# Allegro board flyer.brd
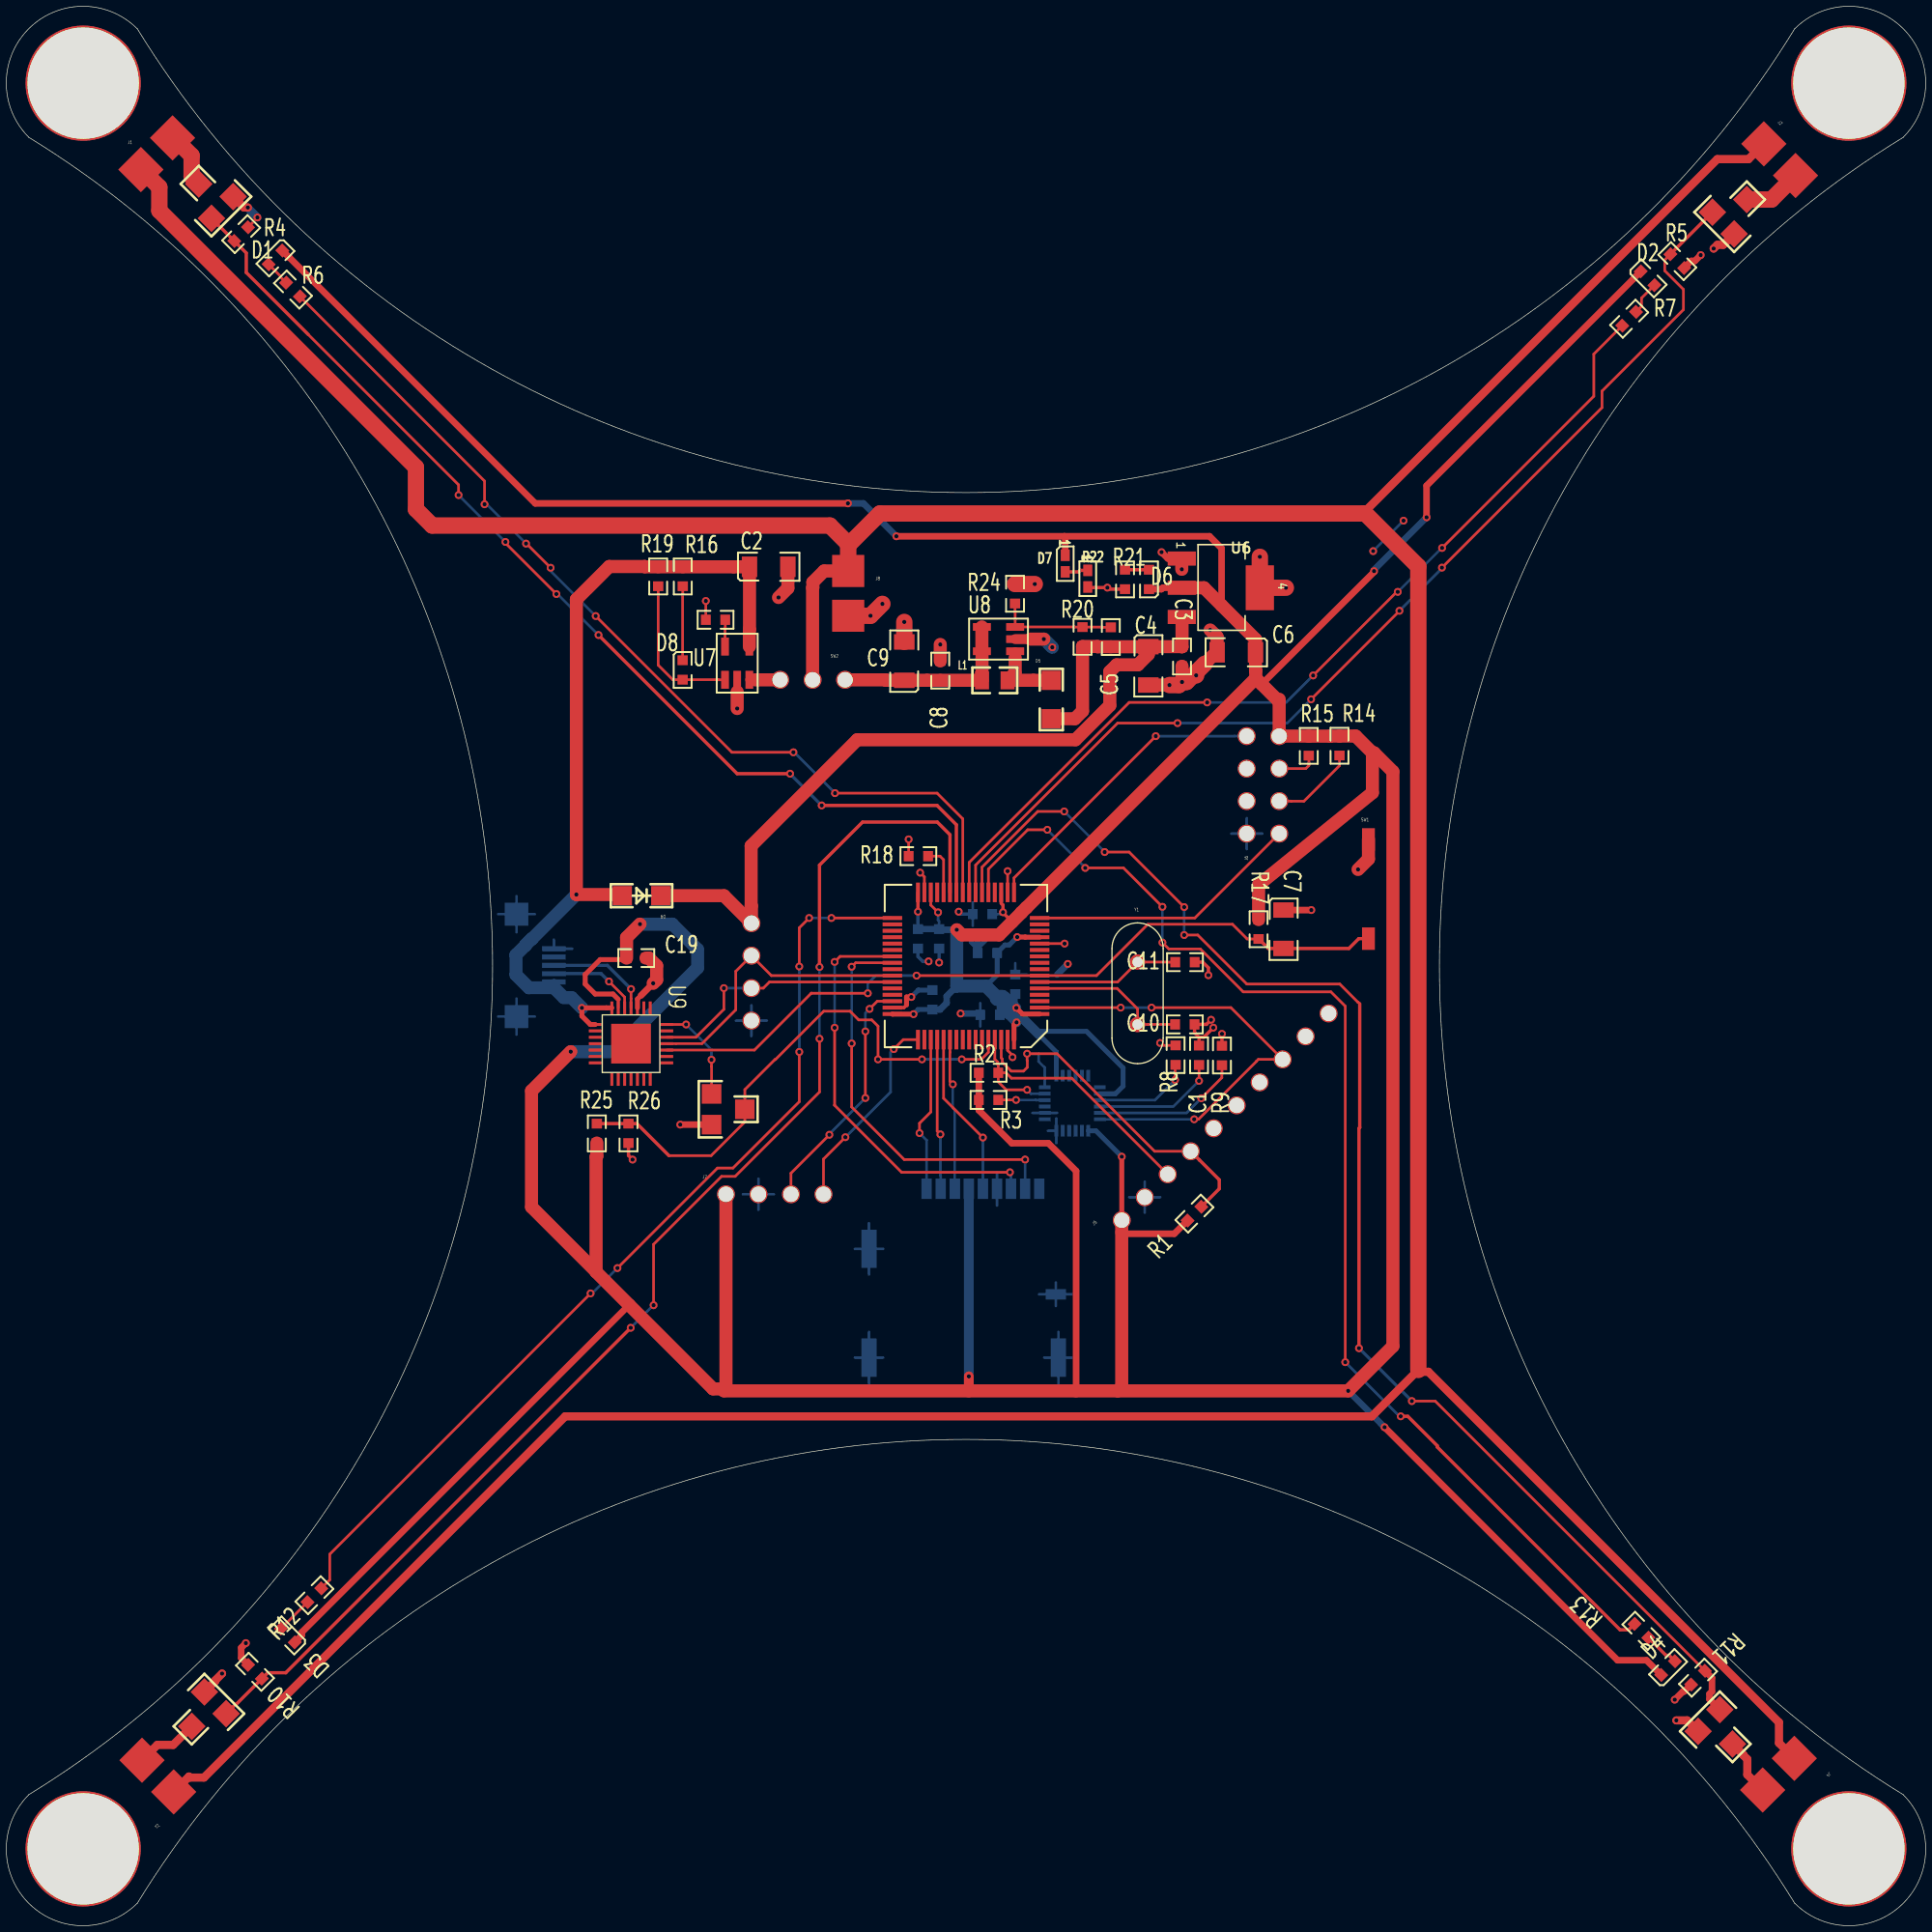
[diagram p0: board, top side]
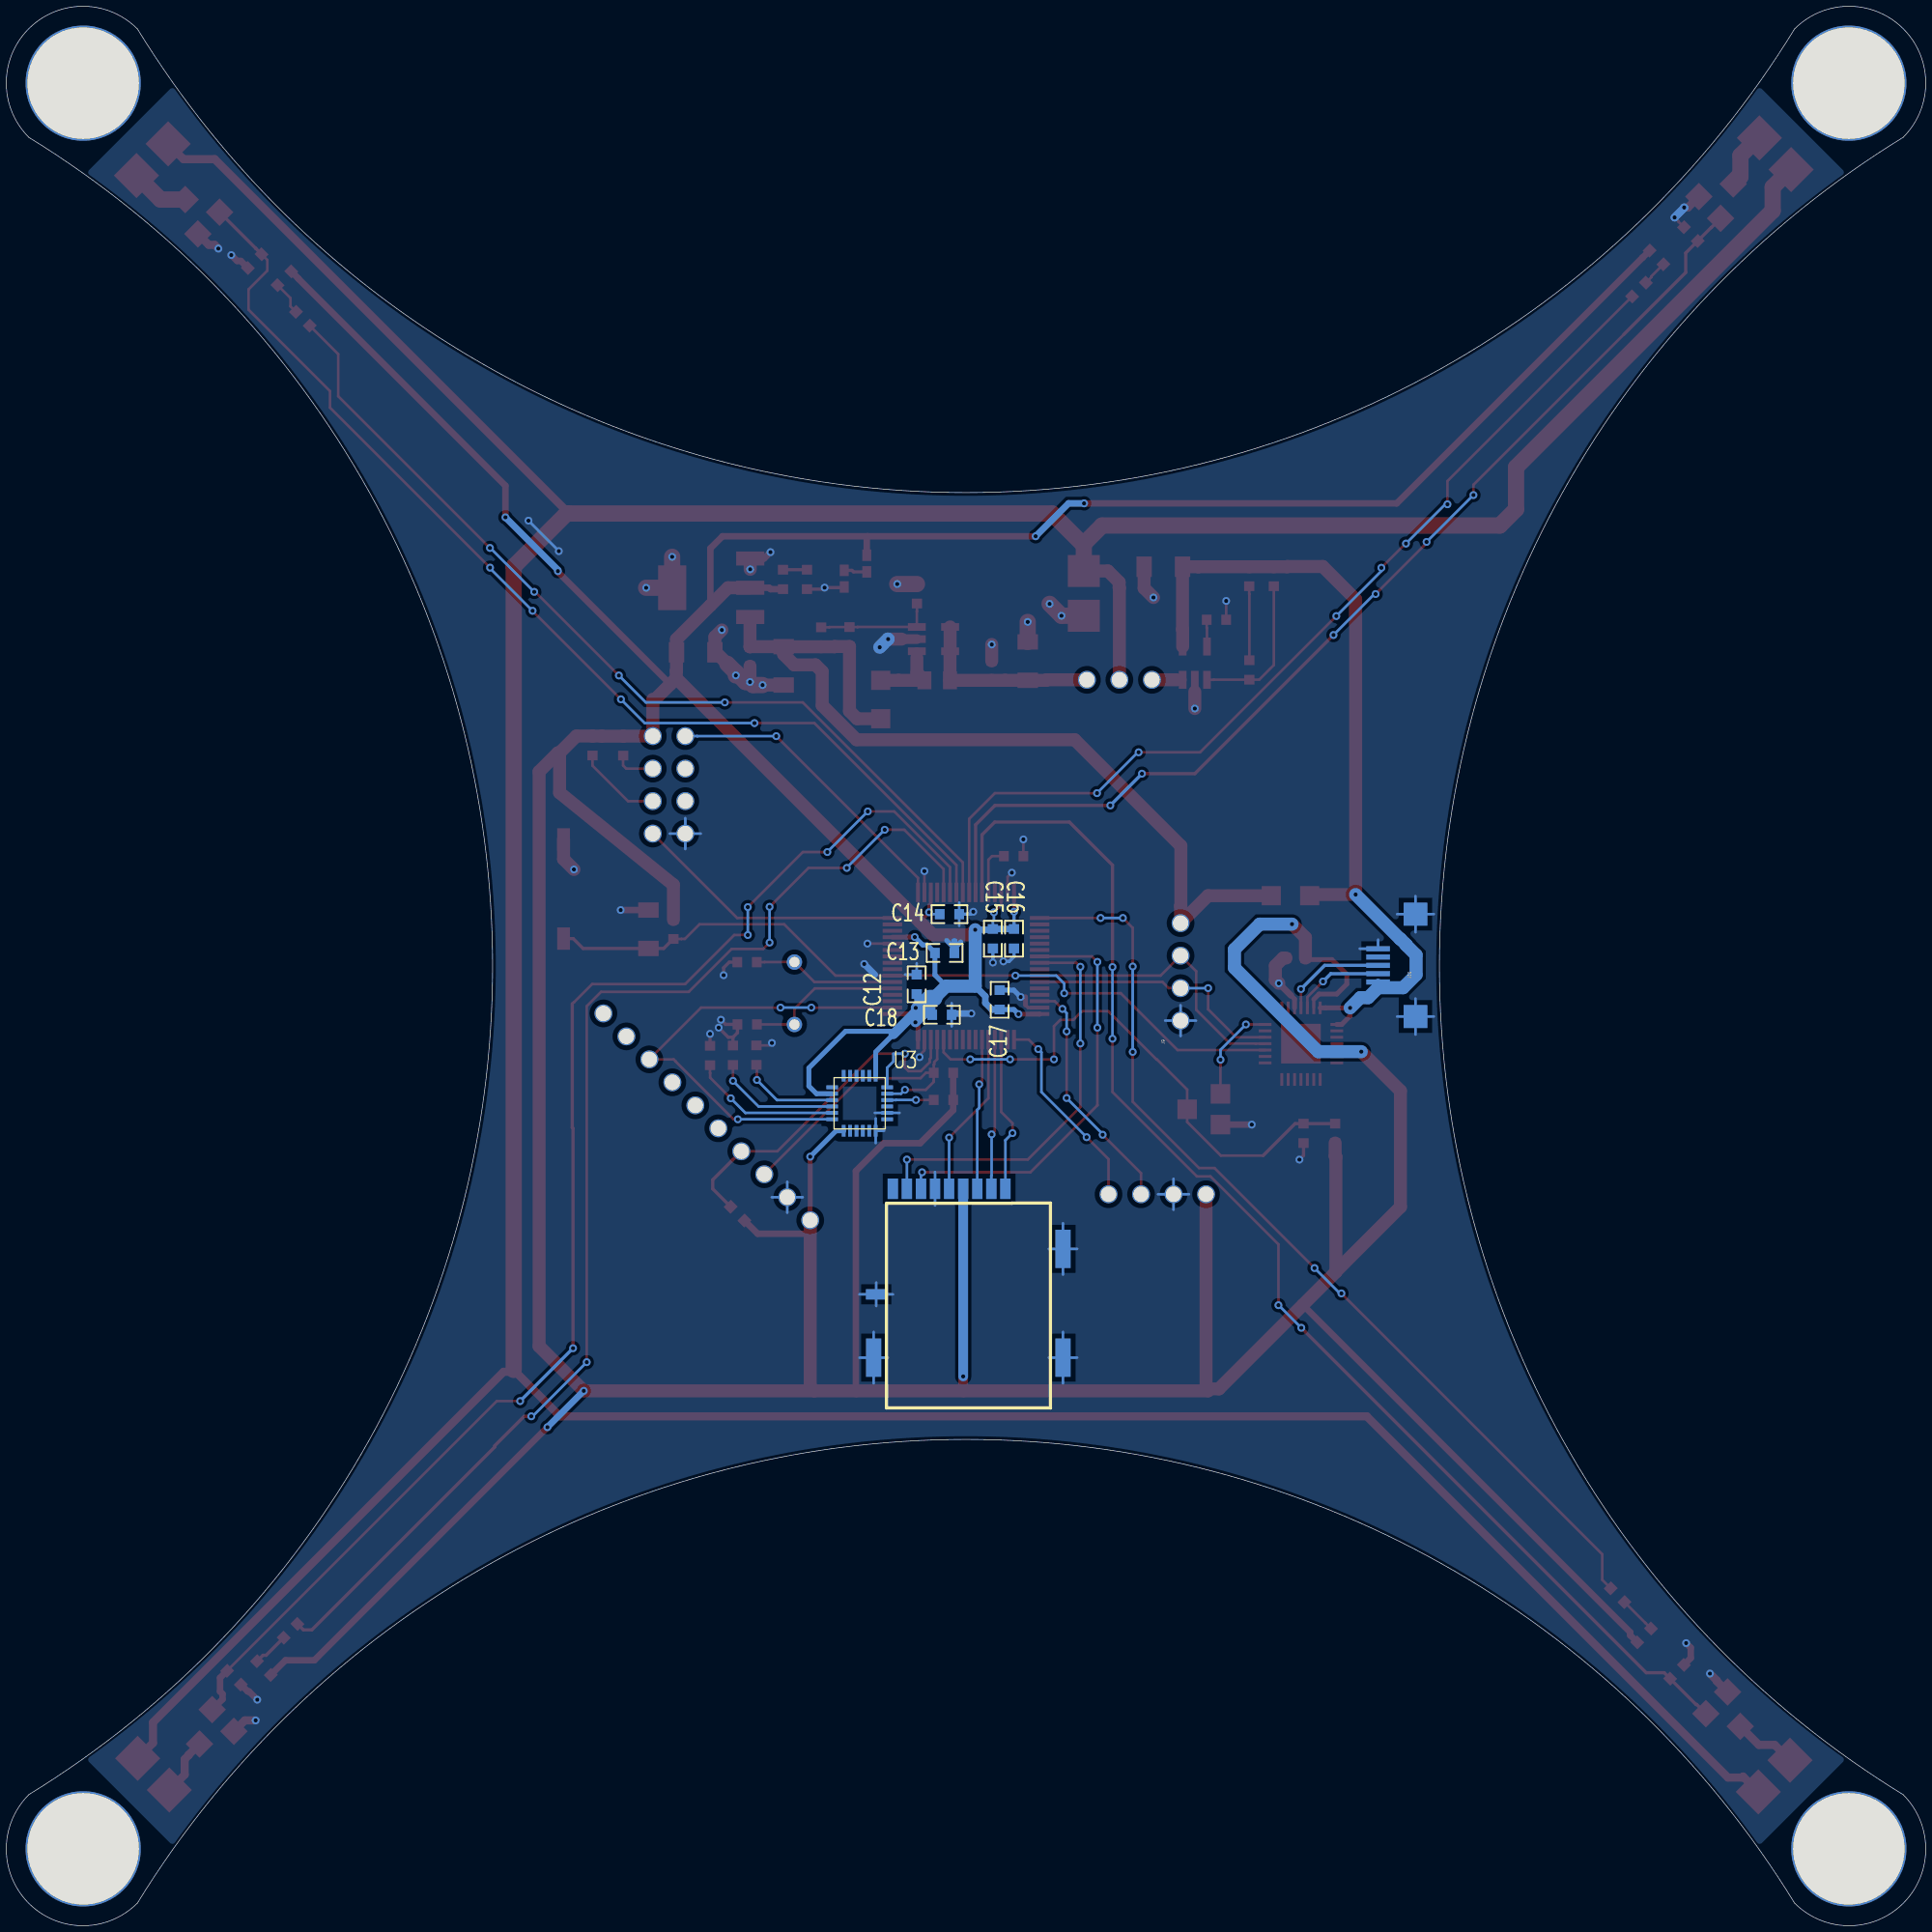
[diagram p1: board, bottom side, seen from below]

Outline 150 x 150 mm; copper layers: TOP, BOTTOM. Coordinates in mm from the lower left corner of the outline.

## Placement (name value [footprint] x y rotation side)
C1  100n  [NP0603]  93.22 68.03 90 top
C2  10u  [P1206]  59.58 106.21 0 top
C3  100n  [NP0603]  91.89 99.19 270 top
C4  10u  [P1206]  89.25 98.46 270 top
C5  220p  [NP0603]  86.32 100.71 90 top
C6  22uf  [P1206]  96.13 99.52 180 top
C7  10u  [P1206]  99.82 77.88 270 top
C8  100n  [NP0603]  72.99 98.09 90 top
C9  10u  [P1206]  70.18 98.83 90 top
C10  20p  [NP0603]  92.11 70.44 0 top
C11  20p  [NP0603]  92.12 75.3 0 top
C12  100n  [NP0603]  78.86 73.57 90 bottom
C13  100n  [NP0603]  76.68 76.02 180 bottom
C14  100n  [NP0603]  76.29 79.06 180 bottom
C15  100n  [NP0603]  72.9 77.14 270 bottom
C16  100n  [NP0603]  71.25 77.14 270 bottom
C17  100n  [NP0603]  72.37 72.36 90 bottom
C18  100n  [NP0603]  76.89 71.19 180 bottom
C19  100n  [NP0603]  49.23 75.62 0 top
D1  LED  [P0603]  21.03 130.39 225 top
D2  LED  [P0603]  128.27 128.75 315 top
D3  LED  [P0603]  22 22.68 135 top
D4  LED  [P0603]  129.88 20.13 45 top
D5  SCHOTTKY  [SOD123]  81.67 95.73 90 top
D6  LED  [P0603]  89.3 105.22 90 top
D7  LED  [P0402]  82.76 106.46 270 top
D8  LED  [P0603]  52.86 98.14 270 top
D9  SCHOTTKY  [SOD123]  49.74 80.5 180 top
J1  MOTOR1  [PWR]  10.51 137.25 45 top
J2  MOTOR2  [PWR]  137.36 139.26 315 top
J3  MOTOR3  [PWR]  13.08 10.45 135 top
J4  MOTOR4  [PWR]  139.74 13.08 225 top
J5  MPU9250  [SIP_2D54_10P]  88.97 56.93 45 top
J6  ESP8266  [DIP_2D54_8P]  99.48 85.35 90 top
J7  SWD  [SIP_2D54_4P]  58.78 57.16 0 top
J8  BAT  [PWR]  65.8 105.88 270 top
J9  UART1  [SIP_2D54_4P]  58.23 73.27 90 bottom
J10  Mirco_USB  [MIRCO_USB]  42.8 75.05 90 bottom
J11  TF_CARD  [MICRO_SD]  71.92 57.59 0 bottom
L1  10uH  [NP0805]  77.26 97.33 0 top
NOREF  -  [unnamed]  75 75 0 top
R1  10k  [NP0603]  92.86 55.65 45 top
R2  10k  [NP0603]  76.77 66.66 0 top
R3  10k  [NP0603]  76.77 64.54 0 top
R4  10k  [NP0603]  18.35 132.21 45 top
R5  10k  [NP0603]  130.6 130.1 315 top
R6  100  [NP0603]  22.4 127.87 315 top
R7  100  [NP0603]  126.83 125.59 225 top
R8  10k  [NP0603]  91.39 68.04 90 top
R9  10k  [NP0603]  95.01 68.01 90 top
R10  10k  [NP0603]  19.43 19.84 135 top
R11  10k  [NP0603]  132.22 19.38 225 top
R12  100  [NP0603]  24.08 25.83 45 top
R13  100  [NP0603]  127.79 23.04 135 top
R14  10k  [NP0603]  104.2 92.22 270 top
R15  10k  [NP0603]  101.79 92.21 270 top
R16  1k  [NP0603]  52.87 105.45 90 top
R17  10k  [NP0603]  97.87 77.88 270 top
R18  10k  [NP0603]  71.28 83.59 0 top
R19  10k  [NP0603]  50.95 105.45 270 top
R20  33k  [NP0603]  84.11 100.73 90 top
R21  100  [NP0603]  87.43 105.22 270 top
R22  100  [NP0402]  84.52 105.28 270 top
R23  1.5k  [NP0603]  55.43 102.06 180 top
R24  10k  [NP0603]  78.84 104.1 90 top
R25  10k  [NP0603]  46.15 61.92 270 top
R26  10k  [NP0603]  48.62 61.92 90 top
SW1  sw_rst  [SW_RST]  106.46 81.02 270 top
SW2  sw_pwr  [SIP_2D54_3P]  63.01 97.37 180 top
U1  SI2302DS  [SOT23_3]  16.03 132.03 45 top
U2  SI2302DS  [SOT23_3]  131.93 133.92 315 top
U3  MPU9250  [QFN24]  82.06 66.42 270 bottom
U4  SI2302DS  [SOT23_3]  18.59 16.57 135 top
U5  SI2302DS  [SOT23_3]  133.92 18.3 225 top
U6  AMS1117_3V3  [SOT223]  94.92 104.57 270 top
U7  LTC4504  [SOT23_5]  57.12 98.67 0 top
U8  LM27313  [SOT23_5]  77.55 100.55 90 top
U9  CP2102  [QFN28]  50.32 71.43 270 top
U10  S8050  [SOT23_3]  54.12 66.01 270 top
U11  STM32F401RBT6_PX  [LQFP64]  75 75 180 top
Y1  8M  [HC49]  88.41 72.87 270 top

## Library data of the parts
C1 C3 C5 C7 C8 C10-C19 = CAP NP
C2 C4 C6 C9 = CAP
D1-D4 D6-D8 = LED
D5 D9 = DIODE SCHOTTKY
J1-J4 J8 = HEADER 2
J5 = HEADER 5X2
J6 = HEADER 4X2
J7 J9 = 4 HEADER
J10 = HEADER 7
J11 = TF_CARD
L1 = CHOKE
R1-R26 = R
SW1 = SW PUSHBUTTON
SW2 = SW KEY-SPDT
U1 U2 U4 U5 = SI2302DS
U3 = MPU9250
U6 = AMS1117_3V3
U7 = LTC4504
U8 = LM27313
U9 = CP2102
U10 = S8050
U11 = STM32F401RBT6_PX
Y1 = ZTA

## Footprints (pads in the part's own frame, mm; a bottom-side part is the same pattern mirrored in y, then rotated)
DIP_2D54_8P
  round 1.4 hole 1.2: 1(0,0) 2(0,2.54) 3(2.54,0) 4(2.54,2.54) 5(5.08,0) 6(5.08,2.54) 7(7.62,0) 8(7.62,2.54)
HC49
  round 1.2 hole 0.8: 1(-2.44,0) 2(2.44,0)
LQFP64
  rect 1.524x0.305 smd: 1(-5.753,3.753) 2(-5.753,3.252) 3(-5.753,2.752) 4(-5.753,2.252) 5(-5.753,1.751) 6(-5.753,1.251) 7(-5.753,0.751) 8(-5.753,0.25) 9(-5.753,-0.25) 10(-5.753,-0.751) 11(-5.753,-1.251) 12(-5.753,-1.751) 13(-5.753,-2.252) 14(-5.753,-2.752) 15(-5.753,-3.252) 16(-5.753,-3.753) 33(5.753,-3.753) 34(5.753,-3.252) 35(5.753,-2.752) 36(5.753,-2.252) 37(5.753,-1.751) 38(5.753,-1.251) 39(5.753,-0.751) 40(5.753,-0.25) 41(5.753,0.25) 42(5.753,0.751) 43(5.753,1.251) 44(5.753,1.751) 45(5.753,2.252) 46(5.753,2.752) 47(5.753,3.252) 48(5.753,3.753)
  rect 0.305x1.524 smd: 17(-3.753,-5.753) 18(-3.252,-5.753) 19(-2.752,-5.753) 20(-2.252,-5.753) 21(-1.751,-5.753) 22(-1.251,-5.753) 23(-0.751,-5.753) 24(-0.25,-5.753) 25(0.25,-5.753) 26(0.751,-5.753) 27(1.251,-5.753) 28(1.751,-5.753) 29(2.252,-5.753) 30(2.752,-5.753) 31(3.252,-5.753) 32(3.753,-5.753) 49(3.753,5.753) 50(3.252,5.753) 51(2.752,5.753) 52(2.252,5.753) 53(1.751,5.753) 54(1.251,5.753) 55(0.751,5.753) 56(0.25,5.753) 57(-0.25,5.753) 58(-0.751,5.753) 59(-1.251,5.753) 60(-1.751,5.753) 61(-2.252,5.753) 62(-2.752,5.753) 63(-3.252,5.753) 64(-3.753,5.753)
MICRO_SD
  rect 0.813x1.6 smd: 1(0,0) 2(1.1,0) 3(2.2,0) 4(3.3,0) 5(4.4,0) 6(5.5,0) 7(6.6,0) 8(7.7,0) 9(8.8,0)
  rect 1.6x0.813 smd: 10(10.1,8.25)
  rect 1.194x2.997 smd: 11(-4.5,4.7) 12(-4.5,13.2) 13(10.3,13.2)
MIRCO_USB
  rect 0.4x1.85 smd: 1(1.3,0) 2(0.65,0) 3(0,0) 4(-0.65,0) 5(-1.3,0)
  rect 1.8x1.85 smd: 6(4,-2.925) 7(-4,-2.925)
NP0402
  rect 0.9x0.7 smd: 1(-0.65,0) 2(0.65,0)
NP0603
  rect 0.76x0.8 smd: 1(-0.76,0) 2(0.76,0)
NP0805
  rect 1.092x1.397 smd: 1(-1,0) 2(1,0)
P0402
  rect 0.9x0.7 smd: 1(-0.65,0) 2(0.65,0)
P0603
  rect 0.76x0.8 smd: 1(-0.76,0) 2(0.76,0)
P1206
  rect 1.2x1.6 smd: 1(-1.5,0) 2(1.5,0)
PWR
  rect 2.5x2.5 smd: 1(0,0) 2(3.5,0)
QFN24
  rect 0.914x0.305 smd: 1(0,0) 2(0,-0.5) 3(0,-1) 4(0,-1.5) 5(0,-2) 6(0,-2.5) 13(4.3,-2.5) 14(4.3,-2) 15(4.3,-1.5) 16(4.3,-1) 17(4.3,-0.5) 18(4.3,0)
  rect 0.305x0.914 smd: 7(0.9,-3.4) 8(1.4,-3.4) 9(1.9,-3.4) 10(2.4,-3.4) 11(2.9,-3.4) 12(3.4,-3.4) 19(3.4,0.9) 20(2.9,0.9) 21(2.4,0.9) 22(1.9,0.9) 23(1.4,0.9) 24(0.9,0.9)
QFN28
  rect 0.991x0.229 smd: 1(-0.3,0) 2(-0.3,-0.5) 3(-0.3,-1) 4(-0.3,-1.5) 5(-0.3,-2) 6(-0.3,-2.5) 7(-0.3,-3) 15(5.3,-3) 16(5.3,-2.5) 17(5.3,-2) 18(5.3,-1.5) 19(5.3,-1) 20(5.3,-0.5) 21(5.3,0)
  rect 0.229x0.991 smd: 8(1,-4.3) 9(1.5,-4.3) 10(2,-4.3) 11(2.5,-4.3) 12(3,-4.3) 13(3.5,-4.3) 14(4,-4.3) 22(4,1.3) 23(3.5,1.3) 24(3,1.3) 25(2.5,1.3) 26(2,1.3) 27(1.5,1.3) 28(1,1.3)
  rect 3.099x3.099 smd: 29(2.5,-1.5)
SIP_2D54_3P
  round 1.4 hole 1.2: 1(-2.54,0) 2(0,0) 3(2.54,0)
SIP_2D54_4P
  round 1.4 hole 1.2: 1(-2.54,0) 2(0,0) 3(2.54,0) 4(5.08,0)
SIP_2D54_10P
  round 1.4 hole 1.2: 1(-2.54,0) 2(0,0) 3(2.54,0) 4(5.08,0) 5(7.62,0) 6(10.16,0) 7(12.7,0) 8(15.24,0) 9(17.78,0) 10(20.32,0)
SOD123
  rect 1.499x1.499 smd: 1(-1.4,0) 2(1.6,0)
SOT23_3
  rect 1.524x1.524 smd: 1(1,1) 2(3.4,1) 3(2.2,3.6)
SOT23_5
  rect 0.6x1.4 smd: 1(-0.95,-1.3) 2(0,-1.3) 3(0.95,-1.3) 4(0.95,1.3) 5(-0.95,1.3)
SOT223
  rect 1.1x2.2 smd: 1(-2.285,-3.05) 2(0,-3.05) 3(2.285,-3.05)
  rect 3.5x2.2 smd: 4(0,3.05)
SW_RST
  rect 1.75x1 smd: 1(3.875,0) 2(-3.875,0)
unnamed
  round 9 hole 8.7 unplated: (-69,69) (-69,-69) (69,69) (69,-69)

## Nets
GND: C1.2 C2.2 C3.2 C4.2 C6.2 C7.1 C8.2 C9.2 C10.2 C11.2 C12.2 C13.2 C14.2 C15.2 C16.2 C17.2 C18.2 C19.2 J5.2 J6.2 J7.2 J8.2 J9.1 J10.1 J10.6 J10.7 J11.6 J11.10 J11.11 J11.12 J11.13 R4.2 R5.2 R8.2 R9.2 R10.2 R11.2 R18.1 R21.2 R22.2 R23.2 R24.2 R26.1 SW1.2 U1.2(SOURCE) U2.2(SOURCE) U3.18(GND1) U3.20(GND2) U4.2(SOURCE) U5.2(SOURCE) U6.1(GND) U6.4(G) U7.2(GND) U8.2(GND) U9.3(GND) U10.2(EMITTER) U11.12(VSSA) U11.18(VSS_18) U11.31(VSS_31) U11.47(VSS_47) U11.63(VSS_63)
V3D3: C6.1 C12.1 C13.1 C14.1 C15.1 C16.1 C17.1 C18.1 C19.1 D1.1 D2.1 D3.1 D4.1 D6.1 D7.1 J5.1 J6.7 J7.1 J11.4 R1.1 R2.1 R3.1 R14.1 R15.1 R17.1 R25.2 U3.1(RESV1) U3.8(VDDIO) U3.13(VDD) U6.2(VOUT) U9.6(VDD) U11.1(VBAT) U11.13(VDDA) U11.19(VDD_19) U11.30(VCAP_1) U11.32(VDD_32) U11.48(VDD_48) U11.64(VDD_64)
V5D0: C3.1 C4.1 C5.1 D5.1 D9.1 J9.4 R20.1 U6.3(VIN)
VBAT: J1.1 J2.1 J3.1 J4.1 J8.1 SW2.2
VBATC: SW2.3 U7.3(BAT)
VBATU: C8.1 C9.1 L1.1 SW2.1 U8.4(NSHDN) U8.5(VIN)
VBUS: C2.1 D9.2 J10.5 R16.2 R19.1 U7.4(VIN) U9.7(REGIN) U9.8(VBUS)
BOOT0: R25.1 R26.2 U10.3(COLLECTOR) U11.60(BOOT0)
BOOT1: R18.2 U11.28(BOOT1)
CHPD: J6.3 R14.2
CMD: J11.3 U11.54(PD2)
D0: J11.7 U11.39(PC8)
D1: J11.8 U11.40(PC9)
D2: J11.1 U11.51(PC10)
D3: J11.2 U11.52(PC11)
D+: J10.3 U9.4(D+)
D-: J10.4 U9.5(D-)
ERST: J6.5 R15.2
INT0: J5.8 U3.12(INT) U11.2(PC13)
LED1: R6.2 U11.25(PC5)
LED2: R7.2 U11.24(PC4)
LED3: R13.2 U11.21(PA5)
LED4: R12.2 U11.33(PB12)
NRST: C7.2 R17.2 SW1.1 U9.24(RTS) U11.7(NRST)
OSC_IN: C10.1 U11.5(OSC_IN) Y1.2
OSC_OUT: C11.1 U11.6(OSC_OUT) Y1.1
PWM1: R4.1 U1.1(GATE) U11.26(PB0)
PWM2: R5.1 U2.1(GATE) U11.23(PA7)
PWM3: R11.1 U5.1(GATE) U11.22(PA6)
PWM4: R10.1 U4.1(GATE) U11.27(PB1)
RX1: J9.2 U9.26(TXD) U11.43(PA10)
RX2: J6.8 U11.17(PA3)
SCL1: J5.3 R2.2 U3.23(SCL) U11.61(PB8)
SDA1: J5.4 R1.2 U3.24(SDA) U11.62(PB9)
SWCLK: J7.4 U11.49(PA14)
SWDIO: J7.3 U11.46(PA13)
TCLK: J11.5 U11.53(PC12)
TX1: J9.3 U9.25(RXD) U11.42(PA9)
TX2: J6.1 U11.16(PA2)
N152508: J1.2 U1.3(DRAIN)
N152808: D1.2 R6.1
N153644: D6.2 R21.1
N164042: D8.2 R19.2 U7.1(NCHRG)
N164178: D8.1 R16.1
N164230: R23.1 U7.5(PROG)
N164608: C5.2 R20.2 R24.1 U8.3(FB)
N164640: D5.2 L1.2 U8.1(SW)
N165608: J2.2 U2.3(DRAIN)
N165666: D2.2 R7.1
N166858: J3.2 U4.3(DRAIN)
N166964: J4.2 U5.3(DRAIN)
N167022: D4.2 R13.1
N167070: D3.2 R12.1
N172334: U9.28(DTR) U10.1(BASE)
N184406: R8.1 U3.9(ADO)
N184550: C1.1 U3.10(REGOUT)
N184719: R9.1 U3.11(FSYNC)
N185138: R3.2 U3.22(NCS)
N215524: D7.2 R22.1

Pads without a net: J5 5 6 7 9 10; J6 4 6; J10 2; J11 9; U3 2 3 4 5 6 7 14 15 16 17 19 21; U9 1 2 9 10 11 12 13 14 15 16 17 18 19 20 21 22 23 27 29; U11 3 4 8 9 10 11 14 15 20 29 34 35 36 37 38 41 44 45 50 55 56 57 58 59

## Via types
v1: diameter 0.61, hole 0.33, TOP to BOTTOM, 148 vias

## Routing (per net, layer and track width the routed paths; a pad name or vN(x,y) marks a point on that pad's centre or on a via; arc(x,y) is an arc through that point)
GND: length 169.2
  TOP w0.203: v1(78.64,67.88) 78.64,68.03 78.26,68.41 U11.63 ; U11.31 71.75,81.97 v1(71.42,82.3) ; 49.43,72.53 49.6,72.7 ; R8.2 90.37,68.8 v1(90.18,68.99) ; v1(19.62,133.51) 19.32,133.2 19.32,133.17 R4.2 ; R23.2 v1(54.67,103.53) ; R18.1 v1(70.52,84.9) ; U11.12 v1(82.71,76.76) ; U11.18 v1(78.26,82.42)
  TOP w0.254: C1.2 93.22,69.44 ; 93.22,69.44 93.58,69.44 v1(94.33,70.19) ; 93.22,69.44 92.87,69.79 C10.2 93.8,70.44 v1(94.16,70.8) ; C11.2 93.51,75.3 93.95,74.87 v1(93.95,74.28) ; R21.2 86.17,104.46 v1(86.05,104.58) 84.57,104.58 R22.2 ; 70.36,71.96 70.15,71.75 U11.47 ; v1(48.94,59.87) 48.62,60.19 R26.1 ; R9.2 v1(95.01,69.7)
  TOP w0.381: U9.3 49.32,72.42 49.43,72.53 ; 70.36,71.96 70.36,72.58 v1(70.73,72.58)
  TOP w0.508: 57.12,96.43 U7.2 ; v1(130.4,17.66) 131.04,18.31 131.14,18.31 R11.2 ; 49.6,72.7 v1(50.56,73.65) ; v1(132.43,130.57) 131.97,130.11 131.69,130.11 R5.2 ; v1(18.72,22.08) 18.36,21.72 18.36,20.92 R10.2 ; U10.2 v1(52.67,62.61) ; C7.1 v1(101.99,79.38) ; U6.1 90.78,106.85 v1(90.29,107.35)
  TOP w0.635: v1(130.52,16.04) 131.37,16.04 U5.2 ; U2.2 134.19,131.37 133.73,131.37 v1(133.44,131.08) ; v1(16.86,19.7) 16.33,19.17 16.33,19.12 U4.2 ; U1.2 18.58,134.29 v1(18.87,134.29)
  TOP w0.762: 80.04,100.55 U8.2
  TOP w1.016: v1(57.12,95.13) 57.12,96.43 ; C2.2 61.08,104.54 v1(60.35,103.81) ; C8.2 v1(72.99,100.13) ; v1(81.09,100.55) 80.04,100.55 ; SW1.2 106.46,83.36 v1(105.65,82.55) ; C3.2 v1(91.89,97.2) ; v1(50.56,73.65) 50.83,73.92 50.83,75.02 50.22,75.62 C19.2 ; v1(94.09,101.26) 94.63,100.72 C6.2 94.56,99.52 93.66,98.62 ; U6.1 v1(91.87,106.01) ; C4.2 v1(90.9,96.96)
  TOP w1.27: 92.99,97.96 v1(92.99,97.72) ; 92.99,97.96 92.24,97.2 v1(91.89,97.2) 91.65,96.96 v1(90.9,96.96) ; 92.99,97.96 93.66,98.62 ; v1(68.47,103.31) v1(67.54,102.38) J8.2 ; C9.2 v1(70.18,101.89) ; R24.2 v1(80.38,104.86) ; v1(97.97,106.99) U6.4 v1(100,104.57)
  BOTTOM w0.203: v1(109.2,109.81) 106.83,107.44 v1(106.83,107.43) ; 82.02,50.26 J11.10 ; J11.10 80.72,49.34 ; J11.10 83.33,49.34 ; J11.10 82.02,48.43 ; U3.18 82.06,63.09 ; U3.18 82.06,61.16 ; U3.18 81.4,62.12 ; J9.1 59.44,70.73 ; J9.1 57.03,70.73 ; J9.1 58.23,71.94 ; J9.1 58.23,69.53 ; 58.78,55.96 J7.2 ; J7.2 57.58,57.16 ; J7.2 58.78,58.37 ; J7.2 59.99,57.16 ; J10.6 41.3,79.05 ; J10.6 39.87,77.65 ; J10.6 39.87,80.46 ; J10.6 38.44,79.05 ; 67.42,50.89 J11.11 ; J11.11 66.32,52.89 ; J11.11 67.42,54.9 ; J11.11 68.53,52.89 ; 77.42,56.29 J11.6 77.42,58.9 ; 95.73,85.35 J6.2 ; J6.2 98.15,85.35 ; J6.2 96.94,84.14 ; J6.2 96.94,86.56 ; 67.42,42.39 J11.12 ; J11.12 66.32,44.39 ; J11.12 67.42,46.4 ; J11.12 68.53,44.39 ; 80.2,63.52 U3.20 82.13,63.52 ; 78.86,75.22 C12.2 79.76,74.33 ; J11.13 82.22,46.4 ; J11.13 83.33,44.39 ; J11.13 81.12,44.39 ; J11.13 82.22,42.39 ; 39.87,69.65 J10.7 ; J10.7 41.3,71.05 ; J10.7 38.44,71.05 ; J10.7 39.87,72.46 ; C18.2 76.13,72.1 ; C18.2 75.24,71.19 ; C18.2 76.13,70.28 ; 75.53,79.96 C14.2 75.53,78.15 ; 87.77,56.93 J5.2 ; J5.2 88.97,58.14 ; J5.2 88.97,55.72 ; J5.2 90.18,56.93 ; 42.8,77.06 J10.1 44.23,76.35
  BOTTOM w0.254: v1(74.43,79.25) 74.62,79.06 C14.2 ; v1(72.08,75.36) 71.62,75.36 71.25,75.73 C16.2 ; C15.2 v1(72.9,75.27)
  BOTTOM w0.381: 75.92,76.4 76.51,77 ; C17.2 71.27,73.12 v1(70.73,72.58) ; 75.4,76.89 75.89,76.39 75.89,76.05 C13.2
  BOTTOM w0.508: v1(74.58,71.29) 76.03,71.29 C18.2 ; 75.92,76.93 C13.2 ; 82.13,74.33 v1(82.96,75.16)
  BOTTOM w0.635: v1(18.87,134.29) 18.87,134.26 v1(19.62,133.51)
  BOTTOM w1.016: v1(81.09,100.55) 81.11,100.55 v1(81.75,99.91)
V3D3: length 608.2
  TOP w0.203: 47.82,72.4 U9.6 ; v1(72.82,79.2) 72.25,79.77 U11.30
  TOP w0.254: 78.61,78.45 77.9,79.17 v1(77.9,79.21) 77.9,79.77 77.76,79.91 U11.19 ; U11.32 v1(71.25,79.25)
  TOP w0.381: v1(78.94,71.73) 79.42,71.25 U11.1 ; v1(79.01,77.27) 79.63,77.27 79.64,77.26 U11.13 ; v1(78.96,70.6) 78.76,70.4 U11.64 ; C19.1 48.35,75.5 46.41,75.5 45.24,74.33 45.24,73.59 46.02,72.81 47.41,72.81 47.82,72.4 ; v1(70.9,71.24) 69.26,71.24 U11.48 ; J5.1 v1(87.18,60.1)
  TOP w0.508: v1(65.78,111.16) 41.34,111.16 22.13,130.37 22.12,130.37 D1.1 ; 94.98,103.19 94.98,107.65 94.04,108.59 82.69,108.59 ; D6.1 90.28,104.46 90.39,104.57 U6.2 ; 48.67,48.51 23.09,22.93 23.09,22.7 D3.1 ; v1(111,110.07) 111,112.54 127.18,128.73 127.18,128.74 D2.1 ; 82.69,108.59 82.76,108.52 D7.1 ; 82.69,108.59 v1(69.56,108.59) ; 83.59,41.8 83.61,41.82 83.61,58.98 81.44,61.15 78.59,61.15 76.01,63.73 R3.1 R2.1 ; v1(106.9,105.87) 106.9,105.81 98.12,97.03 ; v1(107.72,38.96) 125.93,20.74 128.19,20.74 D4.1 ; R1.1 91.29,54.08 87.3,54.08 87.18,54.2
  TOP w0.762: 75.21,41.8 75.22,41.81 v1(75.22,42.93)
  TOP w1.016: v1(44.11,68.31) 41.05,65.25 41.05,56.17 46.09,51.13 ; 86.86,41.8 87.18,42.11 J5.1 ; 86.86,41.8 56.09,41.8 56.24,41.95 ; 86.86,41.8 v1(104.88,41.8) 108.37,45.29 108.37,90.2 106.9,91.67 106.77,91.67 ; 106.77,91.67 105.46,92.98 R14.1 104.19,92.97 103.49,92.97 103.48,92.97 R15.1 101.79,92.97 J6.7 99.48,95.66 ; 106.77,91.67 106.77,88.55 97.87,81.35 R17.1 ; v1(74.28,77.84) 74.68,77.44 77.6,77.44 79.33,79.17 79.33,79.18 79.72,79.57 79.73,79.57 97.65,97.49 ; 97.65,97.49 97.65,98.07 97.63,98.09 C6.1 97.63,100.54 93.6,104.57 U6.2 ; 97.65,97.49 99.48,95.66 ; 56.24,41.95 J7.1 ; 56.24,41.95 55.23,41.95 46.09,51.1 46.09,51.13 ; 46.09,51.13 46.09,60.09 46.15,60.15 R25.2 ; 99.48,95.66 99.48,95.85 ; v1(49.52,78.28) 48.47,77.23 C19.1
  BOTTOM w0.203: v1(72.82,79.2) 72.82,78.59 72.9,78.5 C15.1 ; C14.1 77.75,79.06 v1(77.9,79.21)
  BOTTOM w0.254: v1(71.25,79.25) C16.1
  BOTTOM w0.381: 76.56,73.43 77.43,74.31 C13.1 77.43,76.04 78.04,76.65 78.39,76.65 v1(79.01,77.27) ; U3.1 82.06,68.28 80.68,69.67 80.91,69.9 84.42,69.9 87.28,67.04 87.28,65.62 86.69,65.02 U3.8 ; C17.1 71.26,71.6 v1(70.9,71.24) ; v1(87.18,60.1) 85.16,62.12 U3.13 ; C18.1 78.37,71.19 ; 78.17,72.5 78.55,72.5 C12.1 78.86,71.81
  BOTTOM w0.508: 77.85,72.5 77.65,72.3 C18.1 ; C17.1 72.98,71.6 73.49,72.11 73.49,72.64 74.28,73.43 ; v1(65.78,111.16) 66.99,111.16 v1(69.56,108.59) ; v1(74.28,77.84) 72.96,77.84 C15.1 C16.1 ; v1(111,110.07) 106.9,105.97 v1(106.9,105.87) ; v1(104.88,41.8) v1(107.72,38.96)
  BOTTOM w0.762: v1(78.94,71.73) 78.52,72.15 ; v1(78.96,70.6) 77.85,71.71 77.85,72.5 78.17,72.5 78.52,72.15 ; 78.52,72.15 78.52,71.83 80.68,69.67 ; J11.4 v1(75.22,42.93)
  BOTTOM w1.016: v1(74.28,77.84) 74.28,73.43 76.56,73.43 77.49,72.5 ; v1(44.11,68.31) 47.47,68.31 54.02,74.86 54.02,76.3 52.05,78.28 v1(49.52,78.28)
  BOTTOM w1.27: 77.85,72.5 77.49,72.5
V5D0: length 71.3
  TOP w1.016: C4.1 91.88,99.96 C3.1 91.89,102.26 U6.3 ; C4.1 89.25,99.95 C5.1 85.29,99.95 85.27,99.97 R20.1 84.11,94.93 83.51,94.33 D5.1 ; C4.1 89.25,99.36 88.43,98.54 86.77,98.54 86.24,98.01 86.24,95.37 83.56,92.69 66.51,92.69 58.21,84.39 58.21,79.71 58.23,79.69 J9.4 56.09,80.5 D9.1
VBAT: length 390.6
  TOP w0.635: J4.1 138.54,14.27 138.54,15.89 111.14,43.29 110.5,43.29 110.36,43.43 106.73,39.81 43.68,39.81 15.45,11.58 14.35,11.58 14.27,11.65 J3.1 ; J2.1 136.16,138.06 133.72,138.06 106.03,110.37
  TOP w1.016: SW2.2 63.01,104.56 63.03,104.58 63.03,105 63.91,105.88 J8.1
  TOP w1.27: 65.8,107.89 65.8,108 64.37,109.43 33.28,109.43 32.01,110.7 32.01,113.98 11.96,134.04 11.96,135.87 10.57,137.25 J1.1 ; 65.8,107.89 68.28,110.37 106.21,110.37 110.36,106.23 110.36,43.43 ; 65.8,107.89 J8.1
VBATC: length 2.4
  TOP w0.635: 58.52,97.37 U7.3
  TOP w1.016: 58.52,97.37 60.47,97.37 SW2.3
VBATU: length 14.9
  TOP w1.016: SW2.1 68.71,97.37 68.75,97.33 C9.1 71.96,97.33 71.96,97.33 C8.1 76.25,97.33 L1.1 76.26,99.59 U8.5 U8.4
VBUS: length 66.8
  TOP w0.381: U9.7 46.89,71.73 46.89,71.73 v1(44.98,71.73) 44.98,71.1 45.64,70.43 U9.8
  TOP w1.016: U7.4 58.07,101.31 58.08,101.32 C2.1 56.85,106.21 56.85,106.21 R16.2 R19.1 49.91,106.21 49.89,106.23 47.12,106.23 44.55,103.66 v1(44.55,80.59) 48.05,80.59 D9.2
  BOTTOM w0.508: 42.8,73.31 J10.5
  BOTTOM w1.016: v1(44.98,71.73) 44.18,72.53 43.57,72.53 42.8,73.31 40.84,73.31 39.83,74.32 39.83,75.86 40.6,76.64 40.6,76.67 41.05,77.12 41.08,77.12 v1(44.55,80.59)
BOOT0: length 42.1
  TOP w0.203: U11.60 76.76,68.26 76.2,67.71 v1(74.67,67.71) ; v1(71.56,67.71) v1(68.13,67.71) 68.13,70.3 67.64,70.79 66.62,70.79 65.94,71.47 63.89,71.47 60.11,67.69 60.07,67.69 57.72,65.34 U10.3 57.72,62.82 55.08,60.18 51.79,60.18
  TOP w0.254: R25.1 R26.2 49.28,62.68 51.79,60.18
  BOTTOM w0.203: v1(74.67,67.71) v1(71.56,67.71)
BOOT1: length 3.9
  TOP w0.203: R18.2 72.97,83.59 73.25,83.31 U11.28
CHPD: length 6.7
  TOP w0.203: J6.3 100.41,87.89 100.42,87.88 101.41,87.88 104.2,90.67 R14.2
CMD: length 11.8
  TOP w0.203: U11.54 73.75,68.26 73.74,68.25 73.74,65.99 v1(73.97,65.76)
  BOTTOM w0.203: v1(73.97,65.76) 73.97,63.91 74.12,63.76 J11.3
D0: length 33.1
  TOP w0.203: v1(78.44,58.88) 69.97,58.88 64.73,64.13 64.74,64.14 v1(64.74,70.18) ; v1(64.74,75.32) 65.17,75.75 U11.39
  BOTTOM w0.203: 78.55,57.62 J11.7 78.52,58.79 v1(78.44,58.88) ; v1(64.74,75.32) v1(64.74,70.18)
D1: length 31.8
  TOP w0.203: v1(79.62,59.88) 70.18,59.88 66.07,63.99 v1(66.07,68.95) ; v1(66.07,74.94) 66.38,75.25 U11.40
  BOTTOM w0.203: v1(66.07,68.95) v1(66.07,74.94) ; J11.8 v1(79.62,59.88)
D2: length 12.3
  TOP w0.203: v1(71.37,61.94) 71.37,62.71 72.25,63.6 U11.51
  BOTTOM w0.203: v1(71.37,61.94) 71.92,61.39 J11.1
D3: length 11.8
  TOP w0.203: v1(73,61.84) 72.75,62.09 U11.52
  BOTTOM w0.203: J11.2 73.02,58.62 73,58.64 v1(73,61.84)
D+: length 8.3
  TOP w0.203: v1(48.82,73.2) 48.82,72.46 U9.4
  BOTTOM w0.254: J10.3 46.97,75.05 v1(48.82,73.2)
D-: length 7.1
  TOP w0.203: U9.5 48.32,72.57 v1(47.1,73.79)
  BOTTOM w0.254: v1(47.1,73.79) 46.49,74.4 J10.4
ERST: length 3.2
  TOP w0.203: J6.5 101.56,90.43 101.8,90.68 101.8,91.44 R15.2
INT0: length 36.9
  TOP w0.203: v1(89.5,71.75) 95.71,71.75 J5.8 97.85,67.71 97.7,67.56 97.7,67.55 93.18,63.02 v1(92.84,63.02) ; U11.2 v1(87.09,71.75)
  BOTTOM w0.203: v1(87.09,71.75) v1(89.5,71.75) ; U3.12 v1(92.84,63.02)
LED1: length 75.7
  TOP w0.203: v1(40.62,108.02) 40.65,108.02 v1(42.54,106.13) ; v1(37.38,111.09) 37.38,112.9 R6.2 ; v1(61.51,91.71) 56.71,91.71 v1(46.06,102.35) ; v1(64.77,88.51) 72.74,88.51 74.75,86.5 U11.25
  BOTTOM w0.203: v1(42.54,106.13) 42.54,105.88 v1(46.06,102.35) ; v1(64.77,88.51) 61.57,91.71 v1(61.51,91.71) ; v1(37.38,111.09) 37.55,111.09 v1(40.62,108.02)
LED2: length 72.7
  TOP w0.203: v1(112.21,107.68) 124.07,119.54 124.07,122.83 R7.2 ; U11.24 75.25,83.1 87.76,95.6 v1(93.85,95.6) ; v1(102.13,97.71) 108.67,104.25 v1(108.75,104.25)
  BOTTOM w0.203: v1(108.75,104.25) 112.18,107.68 v1(112.21,107.68) ; v1(93.85,95.6) 100.03,95.6 v1(102.13,97.71)
LED3: length 97.7
  TOP w0.203: v1(84.32,82.67) 87.31,82.67 v1(90.36,79.63) ; v1(104.65,44.04) 104.65,71.86 103.53,72.98 96.67,72.98 93.32,76.33 90.86,76.33 v1(90.36,76.84) ; v1(81.36,85.65) 79.83,85.65 76.76,82.58 U11.21
  TOP w0.254: R13.2 126.79,23.12 126.13,23.12 111.84,37.41 111.84,37.51 109.54,39.81 v1(108.98,39.81)
  BOTTOM w0.203: v1(90.36,79.63) v1(90.36,76.84) ; v1(104.65,44.04) 108.88,39.81 v1(108.98,39.81) ; v1(84.32,82.67) 84.32,82.69 v1(81.36,85.65)
LED4: length 75.5
  TOP w0.203: v1(47.76,51.4) 55.58,59.21 56.79,59.21 61.97,64.4 v1(61.97,68.29) ; U11.33 v1(64.49,78.76) ; R12.2 25.28,27.03 25.28,29.03 v1(45.66,49.41) ; v1(62.74,78.76) 61.97,77.99 v1(61.97,74.96)
  BOTTOM w0.203: v1(61.97,74.96) v1(61.97,68.29) ; v1(64.49,78.76) v1(62.74,78.76) ; v1(47.76,51.4) 45.78,49.41 v1(45.66,49.41)
NRST: length 60.5
  TOP w0.203: R17.2 97.24,77.12 97.24,77.12 96.98,77.12 95.83,78.27 89.21,78.27 85.2,74.25 U11.7 v1(71.14,74.25) ; U9.24 58.47,68.43 62.91,72.88 62.92,72.87 v1(67.33,72.87)
  TOP w0.254: SW1.1 105.7,77.14 104.94,76.38 C7.2 98.63,76.38 97.89,77.12 R17.2
  BOTTOM w0.203: v1(71.14,74.25) 67.95,74.25 67.33,73.63 v1(67.33,72.87)
OSC_IN: length 12.5
  TOP w0.203: U11.5 86.81,73.25 88.41,71.65 Y1.2 89.24,70.43 89.25,70.44 C10.1
OSC_OUT: length 11.2
  TOP w0.203: C11.1 90.75,75.3 90.74,75.31 Y1.1 86.85,73.75 U11.6
PWM1: length 84.6
  TOP w0.203: v1(39.01,108.15) 39.01,108.06 v1(42.99,104.08) ; 23.59,124.36 35.34,112.61 v1(35.34,111.81)
  TOP w0.254: U11.26 74.25,86.04 72.74,87.55 v1(63.73,87.55) ; v1(46.28,100.87) 57.12,90.04 v1(61.25,90.04) ; U1.1 16.75,132.72 16.76,132.72 R4.1 18.75,130.73 18.75,129.2 23.59,124.36
  BOTTOM w0.203: v1(42.99,104.08) 43.08,104.08 v1(46.28,100.87) ; v1(35.34,111.81) v1(39.01,108.15)
  BOTTOM w0.254: v1(63.73,87.55) 61.25,90.03 v1(61.25,90.04)
PWM2: length 86
  TOP w0.203: R5.1 129.61,130.19 129.61,129.35 131.08,127.88 131.08,126.3 124.71,119.94 124.71,118.65 v1(112.2,106.14) ; v1(101.97,95.85) 108.88,102.75 v1(108.88,102.76) ; v1(91.54,93.99) 86.85,93.99 75.75,82.89 U11.23
  TOP w0.254: U2.1 130.52,131.1 130.52,131.1 R5.1
  BOTTOM w0.203: v1(101.97,95.85) 100.11,93.99 v1(91.54,93.99) ; v1(108.88,102.76) 112.2,106.09 v1(112.2,106.14)
PWM3: length 108.9
  TOP w0.203: v1(92.06,77.43) 93.12,77.43 96.95,73.59 104.22,73.59 105.63,72.18 105.65,72.18 105.78,72.05 ; v1(85.84,83.91) 87.75,83.91 v1(92.06,79.61) ; R11.1 111.68,41 v1(109.85,41) ; v1(82.68,87.08) 80.61,87.08 76.25,82.73 U11.22
  TOP w0.254: 105.78,72.05 105.78,62.37 105.72,62.31 v1(105.72,45.13)
  TOP w0.508: U5.1 133.11,17.69 133.11,18.11 133.31,18.3 133.31,19.37 R11.1
  BOTTOM w0.203: v1(85.84,83.91) 85.84,83.92 v1(82.68,87.08) ; v1(92.06,79.61) v1(92.06,77.43)
  BOTTOM w0.254: v1(109.85,41) v1(105.72,45.13)
PWM4: length 103.5
  TOP w0.203: v1(63.56,69.32) 63.56,65.16 56.96,58.56 55.9,58.56 50.59,53.25 v1(50.59,48.49)
  TOP w0.254: v1(63.56,74.92) 63.56,82.89 66.92,86.25 72.76,86.25 73.75,85.26 U11.27 ; v1(48.8,46.73) 21.84,19.77 20.43,19.77 R10.1 17.95,17.29 17.9,17.29 U4.1
  BOTTOM w0.203: v1(63.56,74.92) v1(63.56,69.32) ; v1(48.8,46.73) 50.57,48.49 v1(50.59,48.49)
RX1: length 20.4
  TOP w0.203: J9.2 59.16,73.27 59.64,73.75 U11.43 ; v1(56.08,73.27) 56.08,71.62 53.89,69.43 U9.26
  BOTTOM w0.203: J9.2 v1(56.08,73.27)
RX2: length 23.9
  TOP w0.203: U11.17 78.76,81.89 v1(89.83,92.97)
  BOTTOM w0.203: v1(89.83,92.97) 96.01,92.97 96.01,92.97 J6.8
SCL1: length 24
  TOP w0.203: R2.2 78.13,66.66 78.56,66.23 83.26,66.23 J5.3 ; R2.2 77.53,67.29 77.49,67.33 77.49,67.49 77.26,67.72 U11.61 ; R2.2 77.53,66.03 77.53,66.03 77.53,65.95 78.15,65.33 v1(79.78,65.33)
  BOTTOM w0.203: U3.23 80.08,65.02 v1(79.78,65.33)
SDA1: length 30.8
  TOP w0.203: J5.4 89.75,60.52 82.12,68.15 v1(79.78,68.15) 79.78,67.62 79.8,67.6 79.8,67.09 79.5,66.79 78.54,66.79 77.84,67.48 77.84,67.73 77.76,67.82 U11.62
  TOP w0.254: R1.2 94.8,57.59 94.8,58.29 93.24,59.85 J5.4
  BOTTOM w0.203: v1(79.78,68.15) 80.68,68.15 80.68,67.54 81.16,67.05 U3.24
SWCLK: length 15.8
  TOP w0.203: v1(69.36,68.51) 70.1,69.25 U11.49 ; v1(65.58,61.62) 63.86,59.91 J7.4
  BOTTOM w0.203: v1(69.36,68.51) 69.11,68.26 69.11,65.16 v1(65.58,61.62)
SWDIO: length 19.1
  TOP w0.203: J7.3 61.32,58.81 v1(64.33,61.81) ; U11.46 68.07,72.25 v1(67.47,71.65) ; v1(67.14,64.69) v1(67.14,69.89)
  BOTTOM w0.203: v1(67.47,71.65) 67.14,71.32 v1(67.14,69.89) ; v1(67.14,64.69) 64.33,61.87 v1(64.33,61.81)
TCLK: length 12.9
  TOP w0.203: U11.53 73.25,64.67 v1(76.32,61.59)
  BOTTOM w0.203: J11.5 v1(76.32,61.59)
TX1: length 22.9
  TOP w0.203: U9.25 52.35,68.93 52.35,68.94 54.37,68.94 57.01,71.58 57.01,74.59 J9.3 59.79,74.25 U11.42
TX2: length 21.5
  TOP w0.203: U11.16 92.89,78.76 J6.1
N152508: length 4.5
  TOP w1.27: J1.2 13.09,139.73 14.48,138.34 14.48,136.69 U1.3
N152808: length 2
  TOP w0.203: R6.1 21.44,128.84 21.44,128.91 D1.2
N153644: length 1.9
  TOP w0.254: R21.1 D6.2
N164042: length 11.9
  TOP w0.203: R19.2 50.95,98.52 52.09,97.38 D8.2 55.63,97.38 55.64,97.37 U7.1
N164178: length 5.8
  TOP w0.203: R16.1 52.87,104.08 52.86,104.07 D8.1
N164230: length 2.1
  TOP w0.203: R23.1 56.19,101.44 56.17,101.42 U7.5
N164608: length 9.3
  TOP w0.203: C5.2 85.69,101.47 85.67,101.49 R20.2 83.48,101.49 83.47,101.5 U8.3 78.85,102.72 78.84,102.73 R24.1
N164640: length 5.9
  TOP w0.635: U8.1 78.85,99.09
  TOP w1.016: D5.2 80.28,97.33 L1.2 78.85,97.92 78.85,99.09
N165608: length 4.6
  TOP w1.27: U2.3 137.96,134.91 J2.2
N165666: length 2.7
  TOP w0.203: D2.2 127.8,127.21 127.8,126.56 R7.1
N166858: length 5
  TOP w0.635: J3.2 11.8,14.13 13.04,14.13 U4.3
N166964: length 4.6
  TOP w0.635: U5.3 135.76,13.35 135.76,13.32 136.07,13.01 136.07,11.8 J4.2
N167022: length 2.8
  TOP w0.254: R13.1 129.71,21.13 129.95,21.13 D4.2
N167070: length 2.9
  TOP w0.203: R12.1 21.91,23.67 21.91,23.67 D3.2
N172334: length 7.8
  TOP w0.203: v1(55.11,67.68) 55.11,67.14 55.12,67.14 U10.1 ; U9.28 v1(53.13,70.43)
  BOTTOM w0.203: v1(55.11,67.68) 55.11,68.45 v1(53.13,70.43)
N184406: length 7.7
  TOP w0.203: v1(91.35,66.1) 91.35,67.24 R8.1
  BOTTOM w0.203: U3.9 89.77,64.52 v1(91.35,66.1)
N184550: length 9.8
  TOP w0.203: C1.1 v1(93.22,66.03)
  BOTTOM w0.203: v1(93.22,66.03) 91.21,64.02 U3.10
N184719: length 11.7
  TOP w0.203: R9.1 95.01,66.64 95,66.63 95,66.28 v1(93.39,64.67)
  BOTTOM w0.203: v1(93.39,64.67) 92.25,63.52 U3.11
N185138: length 3.6
  TOP w0.203: R3.2 v1(78.92,64.54)
  BOTTOM w0.203: v1(78.92,64.54) 80.47,64.54 80.48,64.52 U3.22
N215524: length 1.8
  TOP w0.254: R22.1 83.92,105.93 83.8,105.81 D7.2

## Copper pours and planes (outline as drawn; the poured copper is in the pictures)
GND on BOTTOM: 137,6.25 75,38.25 13,6.25 6.25,13 38.25,75 6.25,137 13,143.75 75,111.75 137,143.75 143.75,137 111.75,75 143.75,13 ; 11 cut-outs
